# Altium PCB PCB_Base.PcbDoc
Units mil, origin at the board's own origin, x right, y up, seen from the top; angles counter-clockwise.
Board outline 2331.25 x 1793.75 mil, 2 copper layers (Top Layer, Bottom Layer), stack 61.756 mil thick; 101 components, 82 nets, 310 pads, 335 vias.
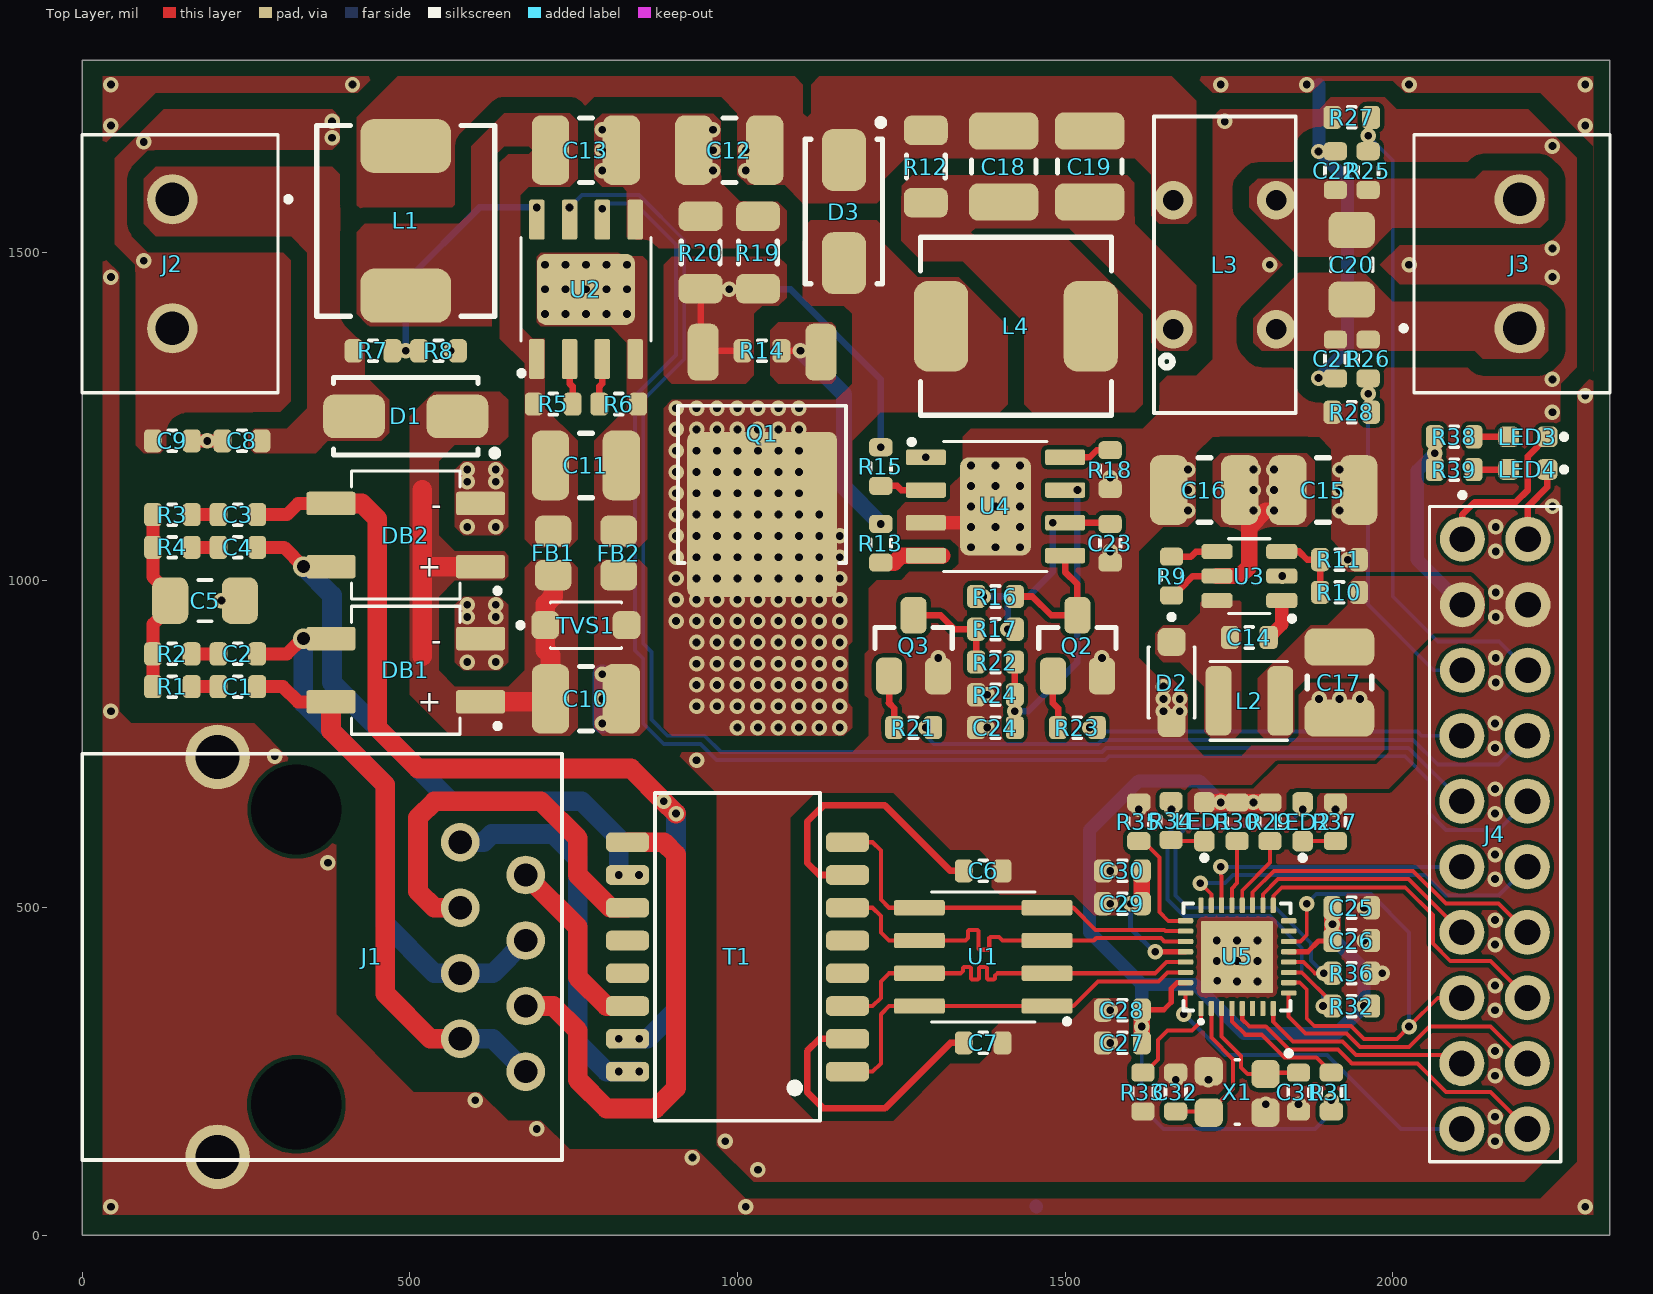
[diagram p0: Top Layer view]
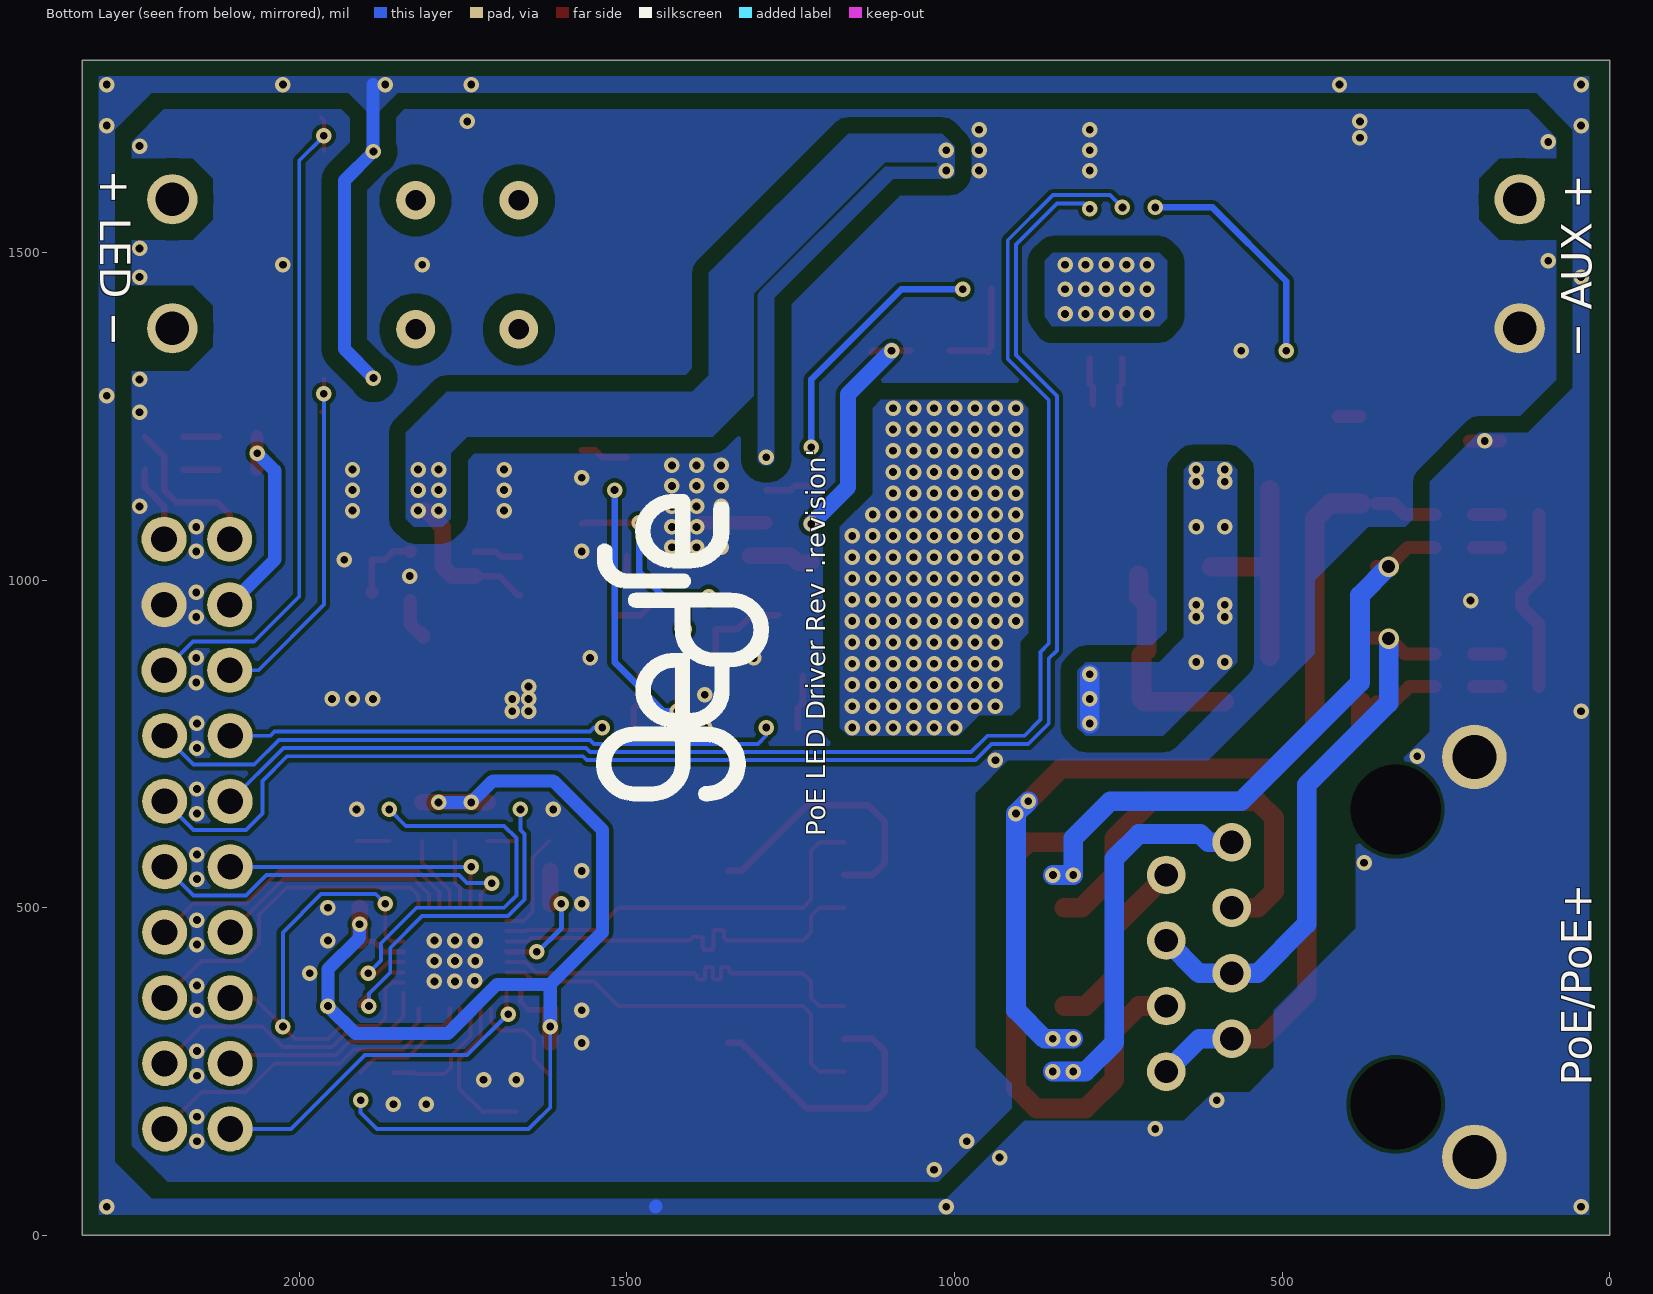
[diagram p1: Bottom Layer view, seen from below]

## Layer stack, top to bottom
Top Solder: solder mask 1, SM-001, Dk 4
Top Layer: signal copper 1.378
Dielectric 1: core 59, Core-043, Dk 4.3
Bottom Layer: signal copper 1.378
Bottom Solder: solder mask 1, SM-001, Dk 4

## Board outline
0,0 2331.25,0 2331.25,1793.75 0,1793.75

## Design rules (kind name [scope] priority, off if disabled: settings)
Clearance Clearance_1 [InNet('VBUS') vs InNet('NetC9_1')] p1: gap=6.25 ignorepadtopadclearanceinfootprint=FALSE
Clearance Clearance_3 [InNet('APD-') vs InNet('NetC10_2')] p2: gap=25 ignorepadtopadclearanceinfootprint=FALSE
Clearance Clearance_9 [InNet('APD-') vs InNet('NetC11_2')] p3: gap=25 ignorepadtopadclearanceinfootprint=FALSE
Clearance Clearance_10 [InNet('APD-') vs InNet('NetD3_A')] p4: gap=25 ignorepadtopadclearanceinfootprint=FALSE
Clearance Clearance_8 [InNet('APD-') vs InNet('NetC18_2')] p5: gap=25 ignorepadtopadclearanceinfootprint=FALSE
Clearance Clearance_7 [InNet('APD-') vs InNet('RETURN')] p6: gap=25 ignorepadtopadclearanceinfootprint=FALSE
Clearance Clearance_6 [InNet('APD-') vs InNet('VLEDN')] p7: gap=25 ignorepadtopadclearanceinfootprint=FALSE
Clearance Clearance_5 [InNet('APD-') vs InNet('VLEDP')] p8: gap=25 ignorepadtopadclearanceinfootprint=FALSE
Clearance Clearance_4 [InNet('VBUS')] p9: gap=25 ignorepadtopadclearanceinfootprint=FALSE
Clearance Clearance_2 [InNet('APD+')] p10: gap=25 ignorepadtopadclearanceinfootprint=FALSE
Clearance [All] p11: gap=6 ignorepadtopadclearanceinfootprint=FALSE
DiffPairsRouting [All] p1: maxlimit=12.5 minlimit=6.25 mostfreqgap=12.5 toplayer_minwidth=6.25 toplayer_maxwidth=10 toplayer_prefwidth=10 bottomlayer_minwidth=6.25 bottomlayer_maxwidth=10 bottomlayer_prefwidth=10 maxuncoupledlength=500
PolygonConnect [All] p1: connectstyle=Direct reliefconductorwidth=10 reliefentries=4 polygonreliefangle="90 Angle" airgapwidth=10
RoutingVias [All] p1: holewidth=11.81 width=23.62 viastyle="Through Hole" minholewidth=11.81 minwidth=23.62 maxholewidth=39.37 maxwidth=78.74
SolderMaskExpansion [All] p1: expansion=0 istentingtop=FALSE
SupplyNets "Schematic Supply Nets" [InNet('3V3')] p1: voltage=0.000
SupplyNets "Schematic Supply Nets_3" [InNet('APD-')] p2: voltage=0.000
SupplyNets "Schematic Supply Nets_2" [InNet('RETURN')] p3: voltage=0.000
SupplyNets "Schematic Supply Nets_1" [InNet('VBUS')] p4: voltage=0.000
Width [All] p1: maxlimit=100 minlimit=6 preferedwidth=30
29 further rules are at their usual default settings.

## Classes and differential pairs
component class Sheet4: J4 LED3 LED4 R38 R39
component class Sheet3: C25 C26 C27 C28 C29 C30 C31 C32 LED1 LED2 R29 R30 R31 R32 R33 R34 R35 R36 R37 U5 X1
component class Sheet1: C10 C11 C12 C13 C14 C15 C16 C17 D1 D2 DB1 DB2 FB1 FB2 L1 L2 R5 R6 R7 R8 R9 R10 R11 TVS1 U2 U3
component class Sheet0: C1 C2 C3 C4 C5 C6 C7 C8 C9 J1 J2 R1 R2 R3 R4 T1 U1
component class Sheet2: C18 C19 C20 C21 C22 C23 C24 D3 J3 L3 L4 Q1 Q2 Q3 R12 R13 R14 R15 R16 R17 R18 R19 R20 R21 R22 R23 R24 R25 R26 R27 R28 U4
differential pair TD: +TD_P -TD_N
differential pair RD: +RD_P -RD_N

## Components (designator, comment, footprint, x,y, rotation, side; value= is the part's Value field where it differs from the comment)
C1 "10n 100V" CAP_SMD_0603 237.5,837.5 r180 top
C2 "10n 100V" CAP_SMD_0603 237.5,887.5 r180 top
C3 "10n 100V" CAP_SMD_0603 237.5,1100 r180 top
C4 "10n 100V" CAP_SMD_0603 237.5,1050 r180 top
C5 "1n 2kV" CAP_SMD_1206 187.5,968.75 r0 top
C6 "100n 16V" CAP_SMD_0603 1375,556.25 r0 top
C7 "100n 16V" CAP_SMD_0603 1375,293.75 r0 top
C8 "10n 100V" CAP_SMD_0603 243.75,1212.5 r180 top
C9 "10n 100V" CAP_SMD_0603 137.5,1212.5 r0 top
C10 "10u 100V" CAP_SMD_1210 768.75,818.75 r0 top
C11 "10u 100V" CAP_SMD_1210 768.75,1175 r0 top
C12 "10u 100V" CAP_SMD_1210 987.5,1656.25 r180 top
C13 "10u 100V" CAP_SMD_1210 768.75,1656.25 r0 top
C14 "100n 16V" CAP_SMD_0603 1781.25,912.5 r180 top
C15 "10u 100V" CAP_SMD_1210 1893.75,1137.5 r0 top
C16 "10u 100V" CAP_SMD_1210 1712.5,1137.5 r180 top
C17 "10u 16V" CAP_SMD_1210 1918.75,843.75 r270 top
C18 "10u 100V" CAP_SMD_1210 1406.25,1631.25 r270 top
C19 "10u 100V" CAP_SMD_1210 1537.5,1631.25 r270 top
C20 "100n 100V" CAP_SMD_1206 1937.5,1481.25 r270 top
C21 "10n 100V" CAP_SMD_0603 1912.5,1337.5 r270 top
C22 "10n 100V" CAP_SMD_0603 1912.5,1625 r90 top
C23 "1u 16V" CAP_SMD_0603 1568.75,1056.25 r270 top
C24 "1u 16V" CAP_SMD_0603 1393.75,775 r180 top
C25 "10u 16V" CAP_SMD_0603 1937.5,500 r0 top
C26 "100n 16V" CAP_SMD_0603 1937.5,450 r0 top
C27 "10u 16V" CAP_SMD_0603 1587.5,293.75 r180 top
C28 "100n 16V" CAP_SMD_0603 1587.5,343.75 r180 top
C29 "10u 16V" CAP_SMD_0603 1587.5,506.25 r180 top
C30 "100n 16V" CAP_SMD_0603 1587.5,556.25 r180 top
C31 "20p 16V" CAP_SMD_0603 1856.25,218.75 r270 top
C32 "20p 16V" CAP_SMD_0603 1668.75,218.75 r90 top
D1 "ES2B" D_SMA 493.75,1250 r180 top
D2 "DSK110" D_SMD_SOD123W 1662.5,843.75 r270 top
D3 "ES2B" D_SMA 1162.5,1562.5 r270 top
DB1 "MB210S" IC_MBS 493.75,862.5 r180 top
DB2 "MB210S" IC_MBS 493.75,1068.75 r180 top
FB1 "30" FB_SMD_0805 718.75,1041.34 r90 top
FB2 "30" FB_SMD_0805 818.75,1041.34 r90 top
J1 "RC00994" CON_PTH_RJ45_RC00994 0,425 r90 top
J2 "5mm pitch" CON_SCREW_5MM 137.5,1482.82 r270 top
J3 "5mm pitch" CON_SCREW_5MM 2193.75,1482.82 r90 top
J4 "Header 20P 10x2" CON_PTH_20P_HEADER_10x2_2.54mm_FEMALE 2155.46,612.5 r270 top
L1 "100u 2A" IND_SMD7.1X6.6X5 493.75,1548.33 r90 top
L2 "22u 1A" IND_SMD3X3X1.2MM 1781.25,815.75 r0 top
L3 "1m 2A" IND_CM_PTH_10X6X5 1743.75,1481.25 r90 top
L4 "100u 2A" IND_SMD7.1X6.6X5 1425,1387.5 r0 top
LED1 "YELLOW" LED_SMD_0603 1712.5,631.25 r90 top
LED2 "GREEN" LED_SMD_0603 1862.5,631.25 r90 top
LED3 "RED" LED_SMD_0603 2206.25,1218.75 r180 top
LED4 "BLUE" LED_SMD_0603 2206.25,1168.75 r180 top
Q1 "SE10015" IC_TO252 1037.5,1181.5 r180 top
Q2 "BC846" IC_SOT23 1518.75,900 r270 top
Q3 "BC846" IC_SOT23 1268.75,900 r270 top
R1 "75" RES_SMD_0603 137.5,837.5 r180 top
R2 "75" RES_SMD_0603 137.5,887.5 r180 top
R3 "75" RES_SMD_0603 137.5,1100 r180 top
R4 "75" RES_SMD_0603 137.5,1050 r180 top
R5 "24.9k" RES_SMD_0603 718.75,1268.75 r0 top
R6 "90.9" RES_SMD_0603 818.75,1268.75 r0 top
R7 "120k" RES_SMD_0603 443.75,1350 r0 top
R8 "4k7" RES_SMD_0603 543.75,1350 r0 top
R9 "100k" RES_SMD_0603 1662.5,1006.25 r90 top
R10 "33k" RES_SMD_0603 1918.75,981.25 r180 top
R11 "10k" RES_SMD_0603 1918.75,1031.25 r0 top
R12 "47k" RES_SMD_1206 1287.5,1631.25 r270 top
R13 "10" RES_SMD_0603 1218.75,1056.25 r90 top
R14 "47k" RES_SMD_0603 1037.5,1350 r0 top
R15 "100" RES_SMD_0603 1218.75,1173.28 r90 top
R16 "10k" RES_SMD_0603 1393.75,975 r0 top
R17 "10k" RES_SMD_0603 1393.75,925 r180 top
R18 "100k" RES_SMD_0603 1568.75,1168.75 r90 top
R19 "TBD" RES_SMD_1206 1031.25,1500 r90 top
R20 "TBD" RES_SMD_1206 943.75,1500 r90 top
R21 "1k" RES_SMD_0603 1268.75,775 r0 top
R22 "10k" RES_SMD_0603 1393.75,875 r0 top
R23 "1k" RES_SMD_0603 1518.75,775 r0 top
R24 "10k" RES_SMD_0603 1393.75,825 r180 top
R25 "560k" RES_SMD_0603 1962.5,1625 r90 top
R26 "560k" RES_SMD_0603 1962.5,1337.5 r270 top
R27 "22k" RES_SMD_0603 1937.5,1706.25 r180 top
R28 "22k" RES_SMD_0603 1937.5,1256.25 r180 top
R29 "5k1" RES_SMD_0603 1812.5,631.25 r90 top
R30 "5k1" RES_SMD_0603 1762.5,631.25 r90 top
R31 "5k1" RES_SMD_0603 1906.25,218.75 r270 top
R32 "5k1" RES_SMD_0603 1937.5,350 r0 top
R33 "5k1" RES_SMD_0603 1618.75,218.75 r270 top
R34 "1k" RES_SMD_0603 1661.66,633.13 r90 top
R35 "6k19" RES_SMD_0603 1612.5,631.25 r90 top
R36 "5k1" RES_SMD_0603 1937.5,400 r0 top
R37 "1k" RES_SMD_0603 1912.5,631.25 r90 top
R38 "1k" RES_SMD_0603 2093.75,1218.75 r0 top
R39 "1k" RES_SMD_0603 2093.75,1168.75 r0 top
T1 "H1102NL" T_SMD_H1102NL 1000,425 r90 top
TVS1 "PTVS58VS1UR,115" D_SOD123W 768.75,931.25 r0 top
U1 "SLVU2.8-4.TBT" IC_SOIC8 1375,425 r180 top
U2 "TPS2378" IC_SOIC8_TP 768.75,1443.75 r90 top
U3 "LV2862" IC_SOT23_6 1781.25,1006.25 r180 top
U4 "MXHV9910BE" IC_SOIC8_TP 1393.75,1112.5 r0 top
U5 "IP101G" IC_QFN32_4X4 1762.5,425 r0 top
X1 "25MHz" XTAL_SMD_3525 1762.5,218.75 r270 top

## Footprints (in the part's own frame and the unit in brackets; to place one, negate y for a bottom-side part, rotate by r counter-clockwise, add the part's x,y. Pads: shape width x height; smd on the part's side, far side on the other; paste and mask are expansions set on the pad)
CAP_SMD_0603 [mm] "0603 Chip Capacitor, 2-Leads, Body 1,60x0,80mm, IPC Medium Density"
  rrect50% 0.7x0.9 smd paste-2539.97: 1(-0.75,0) 2(0.75,0)
  silkscreen extent -0.15,-0.4 0.15,0.4, body extent -0.85,-0.45 0.85,0.45, height 0.9
CAP_SMD_1206 [mm] "1206 Chip Capacitor, 2-Leads, Body 3,20x1,60mm, IPC Medium Density"
  rrect50% 1.4x1.8 smd: 1(-1.35,0) 2(1.35,0)
  silkscreen extent -0.25,-0.8 0.25,0.8, body extent -1.7,-0.9 1.7,0.9, height 1.8
CAP_SMD_1210 [mm] "1210 Chip Capacitor, 2-Leads, Body 3,20x2,50mm, IPC Medium Density"
  rrect50% 1.45x2.7 smd: 1(-1.375,0) 2(1.375,0)
  silkscreen extent -0.25,-1.25 0.25,1.25, body extent -1.75,-1.35 1.75,1.35, height 2.5
CON_PTH_20P_HEADER_10x2_2.54mm_FEMALE [mm] "10x2 20P PTH female pin header. 2.54mm pitch"
  round 1.75 hole 1: 1(-11.43,-1.25) 2(-11.43,1.29) 3(-8.89,-1.25) 4(-8.89,1.29) 5(-6.35,-1.25) 6(-6.35,1.29) 7(-3.81,-1.27) 8(-3.81,1.27) 9(-1.27,-1.27) 10(-1.27,1.27) 11(1.27,-1.27) 12(1.27,1.27) 13(3.81,-1.27) 14(3.81,1.27) 15(6.35,-1.27) 16(6.35,1.27) 17(8.89,-1.27) 18(8.89,1.27) 19(11.43,-1.27) 20(11.43,1.27)
  silkscreen extent -13.24,-2.52 12.7,2.56, body extent -12.7,-2.54 12.7,2.54, height 8.52
CON_PTH_RJ45_RC00994 [mm] "RC00994 RJ45 Connector"
  round 1.5 hole 0.9: 1(4.445,-14.65) 2(3.175,-17.19) 3(1.905,-14.65) 4(0.635,-17.19) 5(-0.635,-14.65) 6(-1.905,-17.19) 7(-3.175,-14.65) 8(-4.445,-17.19)
  rrect50% 0x0 hole 3.5 unplated paste-2539.97 mask+0.102: NC5(-5.715,-8.3) NC5(5.715,-8.3)
  round 2.5 hole 1.7: S1(7.75,-5.25) S2(-7.75,-5.25)
  silkscreen extent -7.88,-18.6 7.88,0, body extent -7.9,-18.6 7.9,0, height 13.21
CON_SCREW_5MM [mm]
  round 1.95 hole 1.3: 1(-2.5,0) 2(2.5,0)
  silkscreen extent -5,-3.5 5,4.6, body extent -5.5,-3.5 5,4.1, height 10.01
D_SMA [mm] "Molded Diode, 2-Leads, Body 5,20x2,73mm, IPC Medium Density"
  rrect50% 2.4x1.7 smd: A(2,0) K(-2,0)
  silkscreen extent -3.58,-1.5 2.8,1.55, body extent -2.57,-1.28 2.57,1.28, height 2.51
D_SMD_SOD123W [mm]
  rrect50% 1.08x1.09 smd: A(1.575,0) K(-1.575,0)
  silkscreen extent -2.64,-0.9 1.38,0.9, body extent -1.85,-0.9 1.85,0.9, height 1.02
D_SOD123W [mm]
  rrect50% 1.08x1.09 smd: A(1.575,0) K(-1.575,0)
  silkscreen extent -2.64,-0.9 1.38,0.9, body extent -1.85,-0.9 1.85,0.9, height 1.02
FB_SMD_0805 [mm] "0805 Ferrite Bead, 2-Leads, Body 2,00x1,20mm, IPC Medium Density"
  rrect50% 1.19x1.42 smd: 1(-0.855,0) 2(0.855,0)
  body extent -1.1,-0.7 1.1,0.7, height 1.1
IC_MBS [mm]
  rrect23% 1.91x0.91 smd paste+0 mask+0.102: 1(-2.9,1.225) 2(-2.9,-1.225) 3(2.9,-1.225) 4(2.9,1.225)
  silkscreen extent -3.66,-2.48 2.1,2.48, body extent -3.25,-2.35 3.25,2.35, height 1.66
IC_QFN32_4X4 [mm]
  rrect50% 0.2x0.6 smd paste-100 mask+0.051: 1(-1.4,-2) 2(-1,-2) 3(-0.6,-2) 4(-0.2,-2) 5(0.2,-2) 6(0.6,-2) 7(1,-2) 8(1.4,-2) 17(1.4,2) 18(1,2) 19(0.6,2) 20(0.2,2) 21(-0.2,2) 22(-0.6,2) 23(-1,2) 24(-1.4,2)
  rrect50% 0.6x0.2 smd paste-100 mask+0.051: 9(2,-1.4) 10(2,-1) 11(2,-0.6) 12(2,-0.2) 13(2,0.2) 14(2,0.6) 15(2,1) 16(2,1.4) 25(-2,1.4) 26(-2,1) 27(-2,0.6) 28(-2,0.2) 29(-2,-0.2) 30(-2,-0.6) 31(-2,-1) 32(-2,-1.4)
  rrect5% 2.8x2.8 smd paste-100 mask+0.051: TP(0,0)
  silkscreen extent -2.08,-2.58 2.08,2.08, body extent -2.02,-2.01 2,2.01, height 0.92
IC_SOIC8 [mm] "Generic SOIC8 package"
  rrect25% 1.97x0.59 smd: 1(-2.475,1.905) 2(-2.475,0.635) 3(-2.475,-0.635) 4(-2.475,-1.905) 5(2.475,-1.905) 6(2.475,-0.635) 7(2.475,0.635) 8(2.475,1.905)
  silkscreen extent -3.35,-2.52 2,2.6, body extent -3,-2.45 3,2.45, height 1.75
IC_SOIC8_TP [mm] "Generic SOIC8 package with thermal pad"
  rrect25% 1.55x0.6 smd: 1(-2.7,1.905) 2(-2.7,0.635) 3(-2.7,-0.635) 4(-2.7,-1.905) 5(2.7,-1.905) 6(2.7,-0.635) 7(2.7,0.635) 8(2.7,1.905)
  rrect25% 2.75x3.8 smd: TP(0,0)
  silkscreen extent -3.35,-2.52 2,2.6, body extent -3,-2.45 3,2.45, height 1.75
IC_SOT23 [mil] "Generic SOT23 package"
  rrect50% 56x40 smd: 1(46.26,-37.4) 2(46.26,37.4) 3(-46.26,0)
  silkscreen extent -28,-59 4,59, body extent -49,-59 49,59, height 44
IC_SOT23_6 [mm]
  rrect50% 1.21x0.59 smd: 1(-1.255,0.95) 2(-1.255,0) 3(-1.255,-0.95) 4(1.255,-0.95) 5(1.255,0) 6(1.255,0.95)
  silkscreen extent -1.75,-1.45 0.8,1.75, body extent -1.4,-1.45 1.4,1.45, height 1.45
IC_TO252 [mm] "Generic TO252 package 6.35x9.4mm"
  rrect50% 1.2x2.2 smd: 1(-2.28,-4.23) 3(2.28,-4.23)
  rrect10% 5.8x6.4 smd paste-10: 2(0,2.07)
  silkscreen extent -3.25,-2.15 3.25,3.95, body extent -3.28,-4.95 3.28,4.95, height 2.39
IND_CM_PTH_10X6X5 [mm] "Toroidal common mode choke - 10x6x5 core"
  round 1.5 hole 0.8: 1(-2.5,2) 2(-2.5,-2) 3(2.5,2) 4(2.5,-2)
  silkscreen extent -5.75,-2.75 5.75,2.75, body extent -5.55,-2.55 5.55,2.55, height 11.03
IND_SMD3X3X1.2MM [mm]
  rrect50% 1x2.7 smd: 1(-1.2,0) 2(1.2,0)
  silkscreen extent -1.52,-1.52 1.48,1.52, body extent -1.5,-1.5 1.5,1.5, height 1.21
IND_SMD7.1X6.6X5 [mm] "Precision Wire Wound Inductor, 2-Leads, Body 7,10x6,60mm, IPC Medium Density"
  rrect50% 2.1x3.5 smd: 1(-2.9,0) 2(2.9,0)
  silkscreen extent -3.7,-3.45 3.7,3.45, body extent -3.65,-3.3 3.65,3.3, height 2.81
LED_SMD_0603 [mm]
  rrect50% 0.8x0.8 smd: A(0.75,0) K(-0.75,0)
  silkscreen extent -1.5,-0.1 -1.3,0.1, body extent -0.8,-0.4 0.8,0.4, height 0.65
RES_SMD_0603 [mm] "0603 Chip Resistor, 2-Leads, Body 1,60x0,80mm, IPC Medium Density"
  rrect50% 0.7x0.9 smd: 1(-0.75,0) 2(0.75,0)
  silkscreen extent -0.15,-0.4 0.15,0.4, body extent -0.85,-0.45 0.85,0.45, height 0.45
RES_SMD_1206 [mm] "1206 Chip Resistor, 2-Leads, Body 3.1x1.55mm, IPC Medium Density"
  rrect50% 1.15x1.7 smd: 1(-1.4,0) 2(1.4,0)
  silkscreen extent -0.45,-0.75 0.45,0.75, body extent -1.63,-0.85 1.63,0.85, height 0.45
T_SMD_H1102NL [mm] "350uH 100M LAN Transformer 1:1 Surface Mount-16P,12.7x7mm"
  rrect50% 0.76x1.67 smd paste+0 mask+0.102: 1(-4.445,-4.265) 2(-3.175,-4.265) 3(-1.905,-4.265) 4(-0.635,-4.265) 5(0.635,-4.265) 6(1.905,-4.265) 7(3.175,-4.265) 8(4.445,-4.265) 9(4.445,4.265) 10(3.175,4.265) 11(1.905,4.265) 12(0.635,4.265) 13(-0.635,4.265) 14(-1.905,4.265) 15(-3.175,4.265) 16(-4.445,4.265)
  silkscreen extent -6.35,-3.2 6.35,3.2, body extent -6.35,-4.7 6.35,4.7, height 5.97
XTAL_SMD_3525 [mm] "SMD Crystal 3.5x2.5x0.7mm"
  rrect50% 1.1x1.1 smd: 1(-0.7,1.1) 2(-0.8,-1.1) 3(0.8,-1.1) 4(0.8,1.1)
  silkscreen extent -1.6,-0.08 1.25,2.1, body extent -1.25,-1.6 1.25,1.6, height 0.7

## Part data
C1 C2 C3 C4 C5 C6 C7 C8 C9 C10 C11 C12 C13 C14 C15 C16 C17 C18 C19 C20 C21 C22 C23 C24 C25 C26 C27 C28 C29 C30 C31 C32: library part CAP_SMD, "Capacitor SMD - Generic"
D1 D3: library part ES1J, "100V 2A Super Fast Recovery Rectifier", Datasheet=https://www.onsemi.com/download/data-sheet/pdf/es1j-d.pdf
D2: library part DIODE_SMD, "100V 1A Schottky Barrier Diode"
DB1 DB2: library part MB2S, "100 2A diode bridge", Package="SOT-23-6 Fortune Semiconductor", Check_prices=https://www.snapeda.com/parts/DW01A/Fortune+Semiconductor/view-part/?ref=eda, MF="Fortune Semiconductor", MP=DW01A, SnapEDA_Link=https://www.snapeda.com/parts/DW01A/Fortune+Semiconductor/view-part/?ref=snap
FB1 FB2: library part FB_SMD, "Ferrite bead SMD - Generic"
J1: library part CON_PTH_RJ45_RC00994, "RC00994 RJ45 connector - No LEDs"
J2 J3: library part CON_SCREW-2P-5mm, "5mm pitch 2P screw terminal block"
J4: library part CON_PTH_HEADER_20P_10x2, "10x2 20P PTH pin header - Generic"
L1 L2 L4: library part IND_SMD, "Inductor SMD - Generic"
L3: library part IND_CM_PTH, "Common mode inductor PTH- Generic"
LED1 LED2 LED3 LED4: library part LED_SMD, "LED SMD - Generic"
Q1: library part MOSFET_SMD, "100V 15A 80mOhm N MOSFET"
Q2 Q3: library part TRAN_SMD_NPN, "SMD transistor NPN - Generic"
R1 R2 R3 R4 R5 R6 R7 R8 R9 R10 R11 R12 R13 R14 R15 R16 R17 R18 R19 R20 R21 R22 R23 R24 R25 R26 R27 R28 R29 R30 R31 R32 R33 R34 R35 R36 R37 R38 R39: library part RES_SMD, "Resistor SMD - Generic"
T1: "Isolation and Data Interface (Encapsulated) Pulse Transformer 1:1 Transmitter, 1:1 Receiver Surface Mount", Package="Non Standard Pulse", Check_prices=https://www.snapeda.com/parts/H1102NL/Pulse/view-part/?ref=eda, MF=Pulse, MP=H1102NL, SnapEDA_Link=https://www.snapeda.com/parts/H1102NL/Pulse/view-part/?ref=snap
TVS1: library part ZENER_SMD, "SMD zener diode - Generic"
U1: library part IC_SLVU2.8-4.TBT, "15V Clamp 24A (8/20µs) Ipp Tvs Diode Surface Mount 8-SO", Package="SOIC-8 Semtech", Check_prices=https://www.snapeda.com/parts/SLVU2.8-4.TBT/Semtech/view-part/?ref=eda, MF="Semtech Corporation", MP=SLVU2.8-4.TBT, SnapEDA_Link=https://www.snapeda.com/parts/SLVU2.8-4.TBT/Semtech/view-part/?ref=snap
U2: "IEEE 802.3at PoE High-Power PD Interface", Package="SOT-23-6 Fortune Semiconductor", Check_prices=https://www.snapeda.com/parts/DW01A/Fortune+Semiconductor/view-part/?ref=eda, MF="Fortune Semiconductor", MP=DW01A, SnapEDA_Link=https://www.snapeda.com/parts/DW01A/Fortune+Semiconductor/view-part/?ref=snap
U3: "Buck converter controller", Datasheet=https://www.littelfuse.com/assetdocs/littelfuse-integrated-circuits-mxhv9910-datasheet?assetguid=0135616d-093f-45d8-8766-b0e533f2ef99
U4: "Off-Line, High Brightness LED Driver", Datasheet=https://www.littelfuse.com/assetdocs/littelfuse-integrated-circuits-mxhv9910-datasheet?assetguid=0135616d-093f-45d8-8766-b0e533f2ef99
U5: library part IC_IP101G, "Single Port 10/100 MII/RMII/TP/Fiber Fast Ethernet Transceiver"
X1: library part XTAL_SMD_GND, "SMD Crystal with GND - Generic"

## Via types
v1: diameter 23.62, hole 11.81, Top Layer to Bottom Layer, tented both sides, 333 vias
v2: diameter 31.5, hole 19.68, Top Layer to Bottom Layer, tented both sides, 2 vias

## Nets (pads, with @x,y where several pads share a name; then routed paths per layer and width w, separated by ;. In a path a pad name is that pad's centre, name@x,y a point inside that pad or via, vN(x,y) a via of type N, cw(c..) or ccw(c..) an arc to the next point about the centre after c; other vN are vias at no path point)
3V3: C17.1 C25.1 C26.1 C27.1 C28.1 J4.3 L2.2 LED1.A R10.1 R29.2 R30.2 R31.2 R32.2 R38.1 R39.1 U5.13 U5.31 | length 2308.3
  Top Layer w8: C28.1 1617.65,344.37 1650.62,344.37 1661.95,355.7 1661.95,376.81 1670.77,385.63 U5.31 ; U5.13 1870.37,432.87 1886.88,449.38 C26.1@1907.35,449.38
  Top Layer w20: R39.1 v1(2064.22,1193.75) R38.1
  Top Layer w25: C27.1 v1(1617.03,318.75) C28.1 ; LED1.A@1712.5,660.78 1735.78,660.78 1737.5,662.5 1739.22,660.78 R30.2 R29.2 ; C26.1@1907.35,449.38 C26.1 v1(1907.97,475) C25.1
  Bottom Layer w6: v1(1617.03,318.75) 1617.03,195.47 1643.75,168.75 1650,162.5 1881.25,162.5 1906.25,187.5 v1(1906.25,206.25)
  Bottom Layer w20: v1(1617.03,318.75) 1617.03,382.97 ; v1(1787.5,660.78) v1(1737.5,660.78) 1704.53,693.75 1612.5,693.75 1537.5,618.75 1537.5,462.5 1617.03,382.97 ; v1(1907.97,475) 1907.97,454.53 1956.25,406.25 v1(1956.25,350) 1914.06,307.81 1773.44,307.81 1698.28,382.97 1617.03,382.97 ; v1(2064.22,1193.75) 2037.5,1167.03 2037.5,1031.25 J4.3
ADC_VLEDN: J4.5 R26.2 R28.1 | length 560.6
  Top Layer w6: R26.2 v1(1962.5,1284.38) 1962.5,1260.78 R28.1
  Bottom Layer w6: v1(1962.5,1284.38) 1962.5,962.5 2062.5,862.5 J4.5
ADC_VLEDP: J4.6 R25.2 R27.1 | length 1025.1
  Top Layer w6: R25.2 v1(1962.5,1678.12) 1962.5,1701.72 R27.1
  Bottom Layer w6: v1(1962.5,1678.12) 2000,1640.62 2000,975 2068.75,906.25 2162.5,906.25 J4.6
APD+: C8.1 D1.A J2.1 R7.1 | length 33.8
  Top Layer w20: D1.A@381.25,1250 D1.A
APD-: C6.2 C7.2 C9.1 C12.2 C13.2 C15.2 C16.2 C17.2 C23.2 C24.2 C25.2 C26.2 C27.2 C28.2 C29.2 C30.2 C31.2 C32.2 D2.A J2.2 J4.4 Q2.2 Q3.2 R8.2 R11.2 R18.1 R19.2 R20.2 R24.2 R27.2 R28.2 R33.2 R35.2 R36.2 R37.2 U2.5 U3.2 U4.3 U4.TP U5.TP X1.2 X1.4 | length 108.9
  Top Layer w20: U4.3 1387.5,1087.5 v1(1393.75,1081.25)
  other v1: 1031.25,100 981.25,143.75 2156.25,143.75 2156.25,181.25 1806.25,200 1856.25,200 1668.75,237.5 1718.75,237.5 2156.25,243.75 2156.25,281.25 1568.75,293.75 1568.75,343.75 2156.25,343.75 2156.25,381.25 1762.5,387.5 1793.75,387.5 1732.17,388.42 1984.06,400 1731.25,418.75 1762.5,418.75 1793.75,418.75 2156.25,443.75 1731.25,450 1762.5,450 1793.75,450 1956.25,450 2156.25,481.25 1956.25,500 1568.75,506.25 2156.25,543.75 1568.75,556.25 2156.25,581.25 2156.25,643.75 1612.5,650 1912.5,650 2156.25,681.25 937.5,725 2156.25,743.75 1381.25,775 2156.25,781.25 1650,800 1675,800 1650,818.75 1675,818.75 1887.5,818.75 1918.75,818.75 1950,818.75 1381.25,825 1650,837.5 2157.04,843.75 1306.25,881.25 1556.25,881.25 2157.04,881.25 2157.04,943.75 2157.04,981.25 1831.25,1006.25 1931.25,1031.25 1568.75,1043.75 2157.04,1043.75 1356.25,1050 1393.75,1050 1431.25,1050 1356.25,1081.25 1431.25,1081.25 2157.04,1081.25 1687.5,1106.25 1918.75,1106.25 1356.25,1112.5 1393.75,1112.5 1431.25,1112.5 2243.75,1112.5 1687.5,1137.5 1918.75,1137.5 1356.25,1143.75 1393.75,1143.75 1431.25,1143.75 1568.75,1156.25 1687.5,1168.75 1918.75,1168.75 1356.25,1175 1393.75,1175 1431.25,1175 2243.75,1256.25 2243.75,1306.25 562.5,1350 2243.75,1462.5 1812.5,1481.25 2025,1481.25 93.75,1487.5 2243.75,1506.25 793.75,1625 962.5,1625 793.75,1656.25 962.5,1656.25 2243.75,1662.5 93.75,1668.75 381.25,1675 793.75,1687.5 962.5,1687.5 381.25,1700 1743.75,1700
CDB: J4.10 U2.6 | length 2372.8
  Bottom Layer w6: v1(793.75,1566.69) 802.06,1575 843.75,1575 906.25,1512.5 906.25,1343.75 843.75,1281.25 843.75,892.8 856.25,880.3 856.25,781.25 887.5,750 943.75,750 968.25,725.5 1301.28,725.5 1561.22,725.5 1566.97,731.25 2018.75,731.25 2056.25,693.75 2056.25,643.75 2081.25,618.75 2161.71,618.75 J4.10
CLK: J4.15 U5.10 U5.14 | length 760.8
  Top Layer w6: U5.10 1858.12,385.63 1868.75,375 1868.75,331.25 1880.19,319.81 1936.44,319.81 1956.25,300 2006.25,300 v1(2025,318.75) 2068.75,362.5 J4.15 ; U5.14 1858.99,448.62 1868.75,458.38 v1(1868.75,506.25)
  Bottom Layer w6: v1(1868.75,506.25) 1883.31,520.81 1947.63,520.81 1966.69,520.81 2025,462.5 v1(2025,318.75)
COL: R31.1 U5.4 | length 203.7
  Top Layer w6.25: U5.4 1754.63,326.62 1775,306.25 1800,306.25 1835.07,271.18 1883.35,271.18 R31.1
CRS: R29.1 U5.20 | length 115.4
  Top Layer w6: U5.20 1770.37,526.62 1812.5,568.75 R29.1
DIM: J4.8 R21.2 | length 971.9
  Bottom Layer w6: v1(1287.5,775) 1287.5,762.5 1300,750 1550,750 1556.25,756.25 2031.25,756.25 2068.75,718.75 2161.71,718.75 J4.8
ISET: R35.1 U5.25 | length 164
  Top Layer w6: R35.1@1618.75,601.72 1643.75,576.72 1643.75,493.75 1657.38,480.12 U5.25
LD: C24.1 R22.2 R24.1 U4.7 | length 489
  Top Layer w10: C24.1 v1(1423.28,800) R24.1 R22.2
  Bottom Layer w10: v1(1423.28,800) 1443.75,800 1518.75,875 v1(1518.75,1137.5)
LED_1: J4.1 LED3.K | length 246.5
  Top Layer w10: J4.1 2106.25,1100 2125,1118.75 2187.5,1118.75 2206.25,1137.5 2206.25,1189.22 LED3.K
LED_2: J4.2 LED4.K | length 118.5
  Top Layer w10: J4.2 2206.25,1112.5 2235.78,1142.03 LED4.K
MDC: J4.11 U5.22 | length 427.3
  Top Layer w6: v1(1737.5,562.5) 1737.5,550 1738.88,548.62 U5.22
  Bottom Layer w6: v1(1737.5,562.5) J4.11
MDIO: J4.12 U5.23 | length 576.2
  Top Layer w6: v1(1706.25,537.5) 1723.13,520.62 U5.23
  Bottom Layer w6: v1(1706.25,537.5) 1743.75,537.5 1756.25,550 2050,550 2081.25,518.75 2161.71,518.75 J4.12
NetC1_2: C1.2 R1.1 | length 40.9
  Top Layer w20: R1.1 C1.2
NetC2_2: C2.2 R2.1 | length 40.9
  Top Layer w20: R2.1 C2.2
NetC3_2: C3.2 R3.1 | length 40.9
  Top Layer w20: R3.1 C3.2
NetC4_2: C4.2 R4.1 | length 40.9
  Top Layer w20: R4.1 C4.2
NetC5_1: C5.1 R1.2 R2.2 R3.2 R4.2 | length 284.4
  Top Layer w20: R1.2 R2.2 107.97,932.97 134.35,959.35 C5.1 134.35,978.15 107.97,1004.53 R4.2 R3.2
NetC6_1: C6.1 T1.7 | length 422.9
  Top Layer w10: T1.7 1125,550 1106.25,568.75 1106.25,631.25 1131.25,656.25 1225,656.25 1325,556.25 C6.1
NetC7_1: C7.1 T1.2 | length 422.9
  Top Layer w10: T1.2 1125,300 1106.25,281.25 1106.25,218.75 1131.25,193.75 1225,193.75 1325,293.75 C7.1
NetC10_1: C10.1 D1.K DB1.1 DB2.1 FB1.1 TVS1.K | length 669
  Top Layer w30: 518.75,883.76 518.75,1018.75 ; 518.75,1137.5 518.75,1018.75 ; DB1.1@588.24,814.27 710.14,814.27 C10.1 714.62,885.38 706.74,893.26 TVS1.K 706.74,962.99 718.75,975 FB1.1 ; DB2.1 520.52,1020.52 518.75,1018.75
NetC10_2: C10.2 DB1.2 DB2.2 FB2.1 TVS1.A | length 75
  Bottom Layer w30: v1(793.75,781.25) v1(793.75,818.75) v1(793.75,856.25)
  other v1: 587.5,875 631.25,875 587.5,943.75 631.25,943.75 587.5,962.5 631.25,962.5 587.5,1081.25 631.25,1081.25 587.5,1150 631.25,1150 587.5,1168.75 631.25,1168.75
NetC11_1: C11.1 C13.1 FB1.2 L1.1 R5.1 U2.1
NetC11_2: C11.2 FB2.2 R6.2 U2.4 U2.TP
  other v1: 706.25,1406.25 737.5,1406.25 768.75,1406.25 800,1406.25 831.25,1406.25 706.25,1443.75 737.5,1443.75 768.75,1443.75 800,1443.75 831.25,1443.75 706.25,1481.25 737.5,1481.25 768.75,1481.25 800,1481.25 831.25,1481.25
NetC14_1: C14.1 U3.1 | length 66.9
  Top Layer w20: C14.1 1810.78,916.44 1814.56,920.22 1818.49,920.22 1830.66,932.38 U3.1
NetC14_2: C14.2 D2.K L2.1 U3.6
NetC18_2: C18.2 C19.2 L3.1 L4.2 R12.2
NetC29_1: C29.1 C30.1 U5.28 | length 187.5
  Top Layer w8: v1@1637.5,431.25 1639.12,432.87 U5.28
  Top Layer w25: C29.1 C30.1
  Bottom Layer w8: v1(1600,506.25) 1600,468.75 v1@1637.5,431.25
  other v1: 1637.5,432.87
NetD3_A: D3.A L4.1 Q1.2
  other v1: 1000,775 1031.25,775 1062.5,775 1093.75,775 1125,775 1156.25,775 937.5,807.5 968.75,807.5 1000,807.5 1031.25,807.5 1062.5,807.5 1093.75,807.5 1125,807.5 1156.25,807.5 937.5,840 968.75,840 1000,840 1031.25,840 1062.5,840 1093.75,840 1125,840 1156.25,840 937.5,872.5 968.75,872.5 1000,872.5 1031.25,872.5 1062.5,872.5 1093.75,872.5 1125,872.5 1156.25,872.5 937.5,905 968.75,905 1000,905 1031.25,905 1062.5,905 1093.75,905 1125,905 1156.25,905 906.25,937.5 937.5,937.5 968.75,937.5 1000,937.5 1031.25,937.5 1062.5,937.5 1093.75,937.5 1125,937.5 1156.25,937.5 906.25,970 937.5,970 968.75,970 1000,970 1031.25,970 1062.5,970 1093.75,970 1125,970 1156.25,970 906.25,1002.5 937.5,1002.5 968.75,1002.5 1000,1002.5 1031.25,1002.5 1062.5,1002.5 1093.75,1002.5 1125,1002.5 1156.25,1002.5 906.25,1035 937.5,1035 968.75,1035 1000,1035 1031.25,1035 1062.5,1035 1093.75,1035 1125,1035 1156.25,1035 906.25,1067.5 937.5,1067.5 968.75,1067.5 1000,1067.5 1031.25,1067.5 1062.5,1067.5 1093.75,1067.5 1125,1067.5 1156.25,1067.5 906.25,1100 937.5,1100 968.75,1100 1000,1100 1031.25,1100 1062.5,1100 1093.75,1100 1125,1100 906.25,1132.5 937.5,1132.5 968.75,1132.5 1000,1132.5 1031.25,1132.5 1062.5,1132.5 1093.75,1132.5 906.25,1165 937.5,1165 968.75,1165 1000,1165 1031.25,1165 1062.5,1165 1093.75,1165 906.25,1197.5 937.5,1197.5 968.75,1197.5 1000,1197.5 1031.25,1197.5 1062.5,1197.5 1093.75,1197.5 906.25,1230 937.5,1230 968.75,1230 1000,1230 1031.25,1230 1062.5,1230 1093.75,1230 906.25,1262.5 937.5,1262.5 968.75,1262.5 1000,1262.5 1031.25,1262.5 1062.5,1262.5 1093.75,1262.5
NetJ1_1: J1.1 T1.16 | length 568.3
  Bottom Layer w30: J1.1@601.77,600 612.5,600 625,612.5 718.75,612.5 756.25,575 756.25,293.75 800,250 v1(818.75,250) v1(850,250)
NetJ1_2: J1.2 T1.14 | length 283.1
  Top Layer w30: J1.2 756.25,470.52 756.25,393.75 800,350 T1.14
NetJ1_3: J1.3 T1.11 | length 617.3
  Top Layer w30: J1.3 537.5,500 512.5,525 512.5,637.5 537.5,662.5 700,662.5 756.25,606.25 756.25,550 806.25,500 T1.11
NetJ1_6: J1.6 T1.9 | length 789.3
  Top Layer w30: J1.6 718.75,350 756.25,312.5 756.25,237.5 800,193.75 875,193.75 906.25,225 906.25,581.25 887.5,600 T1.9
NetLED1_K: LED1.K R34.1 | length 43.8
  Top Layer w6: R34.1@1668.75,601.72 LED1.K
NetLED2_K: LED2.K R37.1 | length 50
  Top Layer w6: LED2.K R37.1
NetLED3_A: LED3.A R38.2 | length 53.4
  Top Layer w10: R38.2 LED3.A
NetLED4_A: LED4.A R39.2 | length 53.4
  Top Layer w10: R39.2 LED4.A
NetQ1_1: Q1.1 R13.2 R14.2 | length 376.1
  Top Layer w10: R14.2 v1(1096.16,1350) 1125.3,1350 Q1.1
  Bottom Layer w25: v1(1096.16,1350) 1162.5,1283.66 1162.5,1142.03 v1(1218.75,1085.78)
NetQ1_3: Q1.3 R14.1 R15.2 R19.1 R20.1 | length 541.3
  Top Layer w10: Q1.3@943.75,1356.25 R20.1 ; Q1.3 949.7,1350 R14.1
  Bottom Layer w10: v1(987.5,1443.75) 1081.25,1443.75 1218.75,1306.25 v1(1218.75,1202.81)
NetQ2_1: Q2.1 R23.1 | length 82.1
  Top Layer w10: Q2.1 1481.25,853.64 1481.25,812.5 1489.22,804.53 R23.1
NetQ3_1: Q3.1 R21.1 | length 82.1
  Top Layer w10: Q3.1 1231.35,812.6 1231.25,812.5 1239.22,804.53 R21.1
NetQ3_3: Q3.3 R17.2 R22.1 | length 154.3
  Top Layer w10: Q3.3 1309.99,946.26 1331.25,925 R17.2 R22.1
NetR5_2: R5.2 U2.2 | length 70.6
  Top Layer w10: U2.2 743.75,1300 748.28,1295.47 R5.2
NetR6_1: R6.1 U2.3 | length 70.6
  Top Layer w10: R6.1 789.22,1295.47 793.75,1300 U2.3
NetR7_2: R7.2 R8.1 U2.8 | length 352.8
  Bottom Layer w10: v1(493.75,1350) 493.75,1456.25 606.25,1568.75 v1(693.75,1568.75)
NetR9_2: R9.2 U3.4 | length 72.6
  Top Layer w10: R9.2 1692.03,1035.78 1699.25,1043 1731.19,1043 U3.4
NetR10_2: R10.2 R11.1 U3.3 | length 113.8
  Top Layer w10: U3.3@1830.76,1043.75 1857.04,1043.75 1869.54,1031.25 R11.1 R10.2
  Top Layer w20: U3.3 U3.3@1830.76,1043.75
NetR13_1: R13.1 U4.4 | length 98.2
  Top Layer w25: R13.1 1239.22,1026.72 1250,1037.5 U4.4 U4.4@1312.5,1037.5
NetR15_1: R15.1 U4.2 | length 71.3
  Top Layer w10: R15.1 1243.75,1143.75 1250,1137.5 U4.2
NetR18_2: R18.2 U4.8 | length 73.2
  Top Layer w10: U4.8 1537.5,1187.5 1548.28,1198.28 R18.2
PHY_AD0: R32.1 R34.2 U5.11 | length 568.5
  Top Layer w6: U5.11 1861.12,401.38 1907.97,354.53 R32.1
  Bottom Layer w6: v1(1662.5,650) 1662.5,618.75 1656.25,612.5 1656.25,512.5 1681.25,487.5 1812.5,487.5 1861.12,438.88 1861.12,401.38 1893.75,368.75 v1(1893.75,350)
PHY_AD3: LED2.A R36.1 U5.12 | length 663.6
  Top Layer w6: U5.12 1864.12,417.13 1881.25,400 R36.1
  Bottom Layer w6: v1(1862.5,650) 1837.5,625 1687.5,625 1668.75,606.25 1668.75,518.75 1687.5,500 1820.81,500 1875,445.81 1875,419.61 v1(1894.61,400)
PHY_RESET: J4.19 U5.32 | length 530.1
  Top Layer w6.25: v1(1681.25,337.5) 1683.76,340.01 U5.32
  Bottom Layer w6.25: v1(1681.25,337.5) 1743.75,275 1900,275 2012.5,162.5 J4.19
PoE+: C1.1 DB1.4 J1.7 J1.8 | length 867.2
  Top Layer w20: C1.1 306.25,837.5 329.48,814.27 DB1.4@356.25,814.27
  Top Layer w30: DB1.4 379.58,770.42 462.5,687.5 462.5,368.75 531.25,300 J1.7
  Bottom Layer w30: J1.7@601.77,300 J1.7 626.77,300 J1.8
PoE-: C2.1 DB1.3 J1.4 J1.5 | length 875.7
  Top Layer w20: C2.1 312.5,887.5 335.03,910.03 335.83,910.03 336.81,911.02 v2@336.81,911.81 ; v2@338.19,911.81 378.5,911.81 DB1.3
  Bottom Layer w30: v2(337.5,910.73) 337.5,812.5 462.5,687.5 462.5,475 537.5,400 J1.5 601.77,400 626.77,400 J1.4
PWMD: Q2.3 R16.2 U4.5 | length 206.4
  Top Layer w10: R16.2 1450,975 1478.74,946.26 Q2.3 1518.75,993.65 1500.05,1012.35 U4.5
RD_N: T1.8 U1.4 U1.5 U5.26 | length 616
  Top Layer w6.25: T1.8 1206.25,600 1218.75,587.5 1218.75,512.5 1231.25,500 U1.5 U1.4 1512.5,500 1546.19,466.31 1651.35,466.31 1653.29,464.37 U5.26
RD_P: T1.6 U1.3 U1.6 U5.27 | length 616
  Top Layer w6.25: T1.6 1206.25,500 1218.75,487.5 1218.75,462.5 1231.25,450 U1.6 1312.52,450 1348.14,450 1351.81,453.66 1351.81,464.55 1353.43,466.18 1366.43,466.18 1368.06,464.55 1368.06,437.57 1369.68,435.95 1382.68,435.95 1384.31,437.57 1384.31,453.66 1385.93,455.29 1398.93,455.29 1400.56,453.66 1404.22,450 1437.62,450 U1.3 1543.75,450 1547.56,453.81 1646.17,453.81 1651.36,448.62 U5.27
RETURN: C5.2 C8.2 C9.2 C21.2 C22.2 J1.S1 J1.S2 | length 530.9
  Top Layer w20: C9.2 v1(190.62,1212.5) C8.2
  Bottom Layer w20: 1455.46,44.54 1456.25,43.75 ; v1(1886.77,1308.37) 1931.25,1352.85 1931.25,1609.65 v1(1886.77,1654.13) ; v1@1887.5,1656.25 1887.5,1756.25
  other v1: 43.75,43.75 1012.5,43.75 2293.75,43.75 931.25,118.75 693.75,162.5 600,206.25 375,568.75 293.75,731.25 43.75,800 212.5,968.75 2293.75,1281.25 43.75,1462.5 43.75,1693.75 2293.75,1693.75 43.75,1756.25 412.5,1756.25 1737.5,1756.25 1868.75,1756.25 2025,1756.25 2293.75,1756.25
RXCM: C4.1 DB2.4 T1.10 | length 944.7
  Top Layer w20: C4.1 308.02,1050 v2(337.5,1020.52) DB2.4@356.25,1020.52
  Bottom Layer w30: v2(337.5,1020.52) 381.25,976.77 381.25,843.75 562.5,662.5 762.5,662.5 818.75,606.25 v1(818.75,550) v1@849.68,550 ; v1@824.52,549.84 v1(849.84,549.84)
RXD0: J4.13 U5.18 | length 363.7
  Top Layer w6: U5.18 1801.87,520.62 1825,543.75 2024.21,543.75 J4.13
RXD1: J4.16 U5.17 | length 502.7
  Top Layer w6: U5.17 1818.34,504.46 1818.34,518.34 1831.25,531.25 2018.75,531.25 2061.17,488.83 2061.17,445.35 2087.77,418.75 2149.21,418.75 J4.16
RXDV: J4.14 U5.19 | length 491.6
  Top Layer w6: U5.19 1786.12,523.62 1818.75,556.25 2031.25,556.25 2081.25,506.25 2161.71,506.25 J4.14
RXER: R30.1 U5.21 | length 101.2
  Top Layer w6: U5.21 1754.63,529.63 1762.5,537.5 R30.1
SHDN: J4.7 R23.2 | length 573.1
  Bottom Layer w6: v1(1537.5,775) 1550,775 1556.25,768.75 2037.5,768.75 2043.75,762.5 J4.7
T2P: J4.9 U2.7 | length 2267.4
  Bottom Layer w6: v1(743.75,1568.75) 762.5,1587.5 850,1587.5 918.75,1518.75 918.75,1337.5 856.25,1275 856.25,903.12 868.75,890.62 868.75,787.26 893.51,762.5 950,762.5 975,737.5 1306.25,737.5 1556.25,737.5 1562.5,743.75 2024.21,743.75 J4.9
TD_N: T1.3 U1.2 U1.7 U5.29 | length 622.2
  Top Layer w6.25: T1.3 1206.25,350 1218.75,362.5 1218.75,387.5 1231.25,400 U1.7 1312.6,400 1340.22,400 1343.89,403.66 1343.89,407.83 1345.72,409.67 1354.3,409.67 1356.14,407.83 1356.14,392.31 1357.97,390.47 1366.55,390.47 1368.39,392.31 1368.39,407.83 1370.22,409.67 1378.8,409.67 1380.64,407.83 1380.64,392.31 1382.47,390.47 1391.05,390.47 1392.89,392.31 1392.89,396.34 1396.55,400 1437.36,400 U1.2 1637.5,400 1654.63,417.13 U5.29
TD_P: T1.1 U1.1 U1.8 U5.30 | length 622.5
  Top Layer w6.25: T1.1 1206.25,250 1218.75,262.5 1218.75,337.5 1231.25,350 U1.8 U1.1 1512.5,350 1550,387.5 1642.68,387.5 1656.56,401.38 U5.30
TXCM: C3.1 DB2.3 T1.15 | length 1437.8
  Top Layer w20: C3.1 312.5,1100 329.48,1116.98 DB2.3@356.25,1116.98
  Top Layer w30: DB2.3 426.77,1116.98 450,1093.75 450,775 512.5,712.5 837.5,712.5 v1(887.5,662.5) v1(906.25,643.75)
  Bottom Layer w30: v1(818.75,300) v1(850,300) 862.5,300 906.25,343.75 v1(906.25,643.75) v1(887.5,662.5)
TXD0: J4.18 U5.9 | length 455.7
  Top Layer w6: U5.9 1841.24,333.76 1867.19,307.81 1929.69,307.81 1950,287.5 2025,287.5 2056.25,318.75 2149.21,318.75 J4.18
TXD1: J4.17 U5.8 | length 334.3
  Top Layer w6.25: U5.8 1817.62,326.13 1848.07,295.68 1923.07,295.68 1943.75,275 2092.96,275 J4.17
TXEN: J4.20 U5.5 | length 521
  Top Layer w6.25: U5.5 1770.37,329.63 1781.25,318.75 1806.25,318.75 1841.57,283.43 1878.78,283.43 1916.57,283.43 1937.5,262.5 2037.5,262.5 2081.07,218.93 2149.04,218.93 J4.20
TXER: R33.1 U5.1 | length 161.9
  Top Layer w6.25: R33.1@1617.03,243.75 1641.91,268.63 1641.91,298.16 1656.25,312.5 1693.75,312.5 1707.38,326.13 U5.1
VBUS: C12.1 C15.1 C16.1 C18.1 C19.1 D3.K L1.2 L3.3 R9.1 R12.1 U3.5 U4.1 | length 245.3
  Top Layer w10: R9.1 1665.41,976.72 1675.22,986.52 1694.94,1006.25 U3.5
  Top Layer w25: U3.5 1766.61,1006.25 1781.25,1020.89 1781.25,1081.25 1806.25,1106.25 v1(1818.75,1106.25)
  other v1: 1787.5,1106.25 1787.5,1137.5 1818.75,1137.5 1787.5,1168.75 1818.75,1168.75 1287.5,1187.5 1012.5,1625 1012.5,1656.25
VDD_9910: C23.1 R16.1 R17.1 U4.6 | length 344.1
  Top Layer w10: R16.1 R16.1@1368.75,975 ; R17.1@1418.75,925 R17.1 ; v1(1481.25,1087.5) U4.6 1567.03,1087.5 C23.1
  Bottom Layer w10: v1(1375,975) 1412.5,975 ; v1(1412.5,925) 1412.5,975 ; v1(1481.25,1087.5) 1481.25,1012.5 1443.75,975 1412.5,975
VLEDN: C20.2 C21.1 J3.1 L3.2 R26.1
VLEDP: C20.1 C22.1 J3.2 L3.4 R25.1
XI: C32.1 U5.2 X1.3 | length 239.3
  Top Layer w6.25: C32.1 1717.22,189.22 X1.3 1756.25,224.31 1756.25,268.75 1723.13,301.87 U5.2
XO: C31.1 U5.3 X1.1 | length 196.9
  Top Layer w6.25: U5.3 1738.88,303.44 1768.75,273.57 1768.75,256.25 1778.69,246.31 X1.1 ; X1.1@1803.69,246.31 X1.1 ; C31.1 1825,248.28 1823.03,246.31 X1.1
pads on no net: J1.NC5 T1.4 T1.5 T1.12 T1.13 U5.6 U5.7 U5.15 U5.16 U5.24

## Polygon pours and split planes (outlines as drawn)
VLEDP on Top Layer "m" (solid, remove dead copper, pour order 19): 2225,1625 2137.5,1625 2125,1612.5 1875,1612.5 1793.75,1612.5 1781.25,1600 1781.25,1568.75 1856.25,1493.75 1956.25,1493.75 2000,1537.5 2225,1537.5 2237.5,1550 2237.5,1612.5
VLEDN on Top Layer "m" (solid, remove dead copper, pour order 21): 2225,1337.5 2137.5,1337.5 2125,1350 1875,1350 1856.25,1350 1831.25,1350 1800,1350 1787.5,1362.5 1787.5,1400 1856.25,1468.75 1956.25,1468.75 2000,1425 2225,1425 2237.5,1412.5 2237.5,1350
3V3 on Top Layer "3V3_L01_P027" (solid, remove dead copper, pour order 27): 1693.75,681.25 1687.5,675 1687.5,650 1693.75,643.75 1831.25,643.75 1837.5,650 1837.5,675 1843.75,681.25 1993.75,681.25 2031.25,718.75 2031.25,887.5 2062.5,918.75 2118.75,918.75 2140.62,940.62 2140.62,984.37 2118.75,1006.25 1943.75,1006.25 1931.25,993.75 1931.25,962.5 1900,931.25 1875,931.25 1793.75,850 1793.75,768.75 1806.25,756.25 1837.5,756.25 1850,768.75 1850,831.25 1868.75,850 1975,850 1993.75,831.25 1993.75,737.5 1975,718.75 1825,718.75 1787.5,681.25
APD- on Top Layer "APD-_L01_P039" (solid, remove dead copper, pour order 39): 1662.5,850 1643.75,850 1612.5,881.25 1612.5,1043.75 1650,1081.25 1687.5,1081.25 1700,1093.75 1700,1231.25 1356.25,1231.25 1343.75,1218.75 1343.75,1162.5 1325,1143.75 1325,1125 1318.75,1118.75 1256.25,1118.75 1243.75,1106.25 1243.75,1068.75 1250,1062.5 1325,1062.5 1337.5,1050 1337.5,1025 1325,1012.5 1262.5,1012.5 1250,1000 1212.5,1000 1200,987.5 1200,893.75 1193.75,887.5 1193.75,825 1200,818.75 1200,681.25 1687.5,681.25 1687.5,825
APD- on Top Layer "APD-_L01_P040" (solid, remove dead copper, pour order 40): 2281.25,1643.75 2281.25,1325 2256.25,1300 2256.25,137.5 2200,81.25 1025,81.25 968.75,137.5 968.75,675 906.25,737.5 1175,737.5 1206.25,768.75 1675,768.75 1712.5,731.25 1768.75,731.25 1784.38,746.88 1840.62,746.88 1856.25,762.5 1856.25,825 1874.76,843.51 1943.75,843.51 1943.75,1012.5 1931.25,1012.5 1918.75,1025 1918.75,1049.76 1906.25,1062.26 1906.25,1200 1887.5,1218.75 1725,1218.75 1699.59,1193.34 1699.59,1162.26 1612.5,1162.26 1612.5,1224.76 1643.75,1256.01 1643.75,1299.76 1656.25,1312.26 1700,1312.26 1725,1337.26 1725,1706.25 1737.5,1718.75 1887.5,1718.75 1906.25,1737.5 1987.5,1737.5 2006.25,1718.75 2206.25,1718.75
APD- on Top Layer "APD-_L01_P029" (solid, remove dead copper, pour order 29): 1687.5,768.75 1687.5,806.25 1612.5,881.25 1612.5,1043.75 1650,1081.25 1687.5,1081.25 1700,1093.75 1700,1181.25 1687.5,1193.75 1612.5,1193.75 1587.5,1168.75 1562.5,1168.75 1550,1156.25 1550,1125 1556.25,1118.75 1587.5,1118.75 1600,1106.25 1600,1068.75 1587.5,1056.25 1562.5,1056.25 1550,1043.75 1550,987.5 1556.25,981.25 1556.25,918.75 1531.25,893.75 1531.25,756.25 1675,756.25
NetC14_2 on Top Layer "3" (solid, remove dead copper, pour order 26): 1637.5,887.5 1650,875 1675,875 1712.5,837.5 1712.5,768.75 1725,756.25 1756.25,756.25 1768.75,768.75 1768.75,975 1762.5,981.25 1712.5,981.25 1706.25,975 1706.25,950 1687.5,931.25 1650,931.25 1637.5,918.75
RETURN on Top Layer "RETURN_L01_P015" (solid, remove dead copper, pour order 15): 2306.25,1662.5 2306.25,1312.5 2281.25,1287.5 2281.25,112.5 2225,56.25 1012.5,56.25 1012.5,31.25 2306.25,31.25 2306.25,1768.75 1700,1768.75 1725,1743.75 1875,1743.75 1893.75,1762.5 2000,1762.5 2018.75,1743.75 2225,1743.75
NetC18_2 on Top Layer "NETC18_2_L01_P013" (solid, remove dead copper, pour order 13): 1581.25,1618.09 1594.47,1618.09 1606.28,1606.28 1606.28,1543.78 1700,1450.06 1700,1362.5 1687.53,1350.03 1643.78,1350.03 1631.28,1362.53 1631.28,1411.81 1506.25,1536.84 1362.5,1536.84 1356.25,1530.59 1362.5,1524.34 1500,1524.34 1618.75,1405.59 1618.75,1268.75 1606.25,1256.25 1450,1256.25 1437.5,1268.75 1437.5,1393.09 1343.75,1486.84 1281.25,1486.84 1250,1518.09 1250,1605.59 1262.5,1618.09
VBUS on Top Layer "VBUS_L01_P028" (solid, remove dead copper, pour order 28): 1868.75,1193.75 1881.25,1181.25 1881.25,1093.75 1868.75,1081.25 1812.5,1081.25 1793.75,1062.5 1793.75,1018.75 1768.75,993.75 1712.5,993.75 1706.25,1000 1706.25,1012.5 1712.5,1018.75 1756.25,1018.75 1768.75,1031.25 1768.75,1062.5 1750,1081.25 1737.5,1081.25 1725,1093.75 1725,1181.25 1737.5,1193.75
APD- on Top Layer "APD-_L01_P031" (solid, remove dead copper, pour order 31): 1981.25,818.75 1968.75,831.25 1875,831.25 1862.5,818.75 1862.5,768.75 1875,756.25 1968.75,756.25 1981.25,768.75
NetC10_2 on Top Layer "NETC10_2_L01_P038" (solid, remove dead copper, pour order 38): 650,1081.25 637.5,1068.75 581.25,1068.75 568.75,1081.25 568.75,1168.75 581.25,1181.25 637.5,1181.25 650,1168.75
NetC11_1 on Top Layer "NETC11_1_L01_P002" (solid, remove dead copper, pour order 2): 431.25,1543.75 418.75,1531.25 418.75,1525 418.75,1406.25 437.5,1387.5 625,1387.5 625,1643.75 643.75,1662.5 681.25,1662.5 687.5,1656.25 681.25,1650 650,1650 637.5,1637.5 637.5,1368.75 675,1331.25 675,1062.5 687.5,1050 743.75,1050 756.25,1062.5 756.25,1212.5 706.25,1262.5 706.25,1368.75 687.5,1368.75 668.75,1387.5 668.75,1587.5 681.25,1600 743.75,1600 756.25,1612.5 756.25,1700 743.75,1712.5 643.75,1712.5 593.75,1662.5 593.75,1562.5 575,1543.75
APD- on Top Layer "APD-_L01_P037" (solid, remove dead copper, pour order 37): 50,1643.75 50,1512.51 81.25,1481.26 81.25,1206.25 93.75,1193.75 118.75,1193.75 131.25,1206.25 131.25,1231.25 156.25,1256.25 306.25,1256.25 318.75,1268.75 318.75,1487.5 306.25,1500 100,1500 75,1525 75,1631.25 100,1656.25 381.25,1656.25 393.75,1668.75 393.75,1706.25 381.25,1718.75 125,1718.75
RETURN on Top Layer "RETURN_L01_P024" (solid, remove dead copper, pour order 24): 56.25,1468.75 31.25,1493.75 31.25,1662.5 112.5,1743.75 425,1743.75 450,1768.75 31.25,1768.75 31.25,31.25 1012.5,31.25 1012.5,56.25 937.5,131.25 743.75,131.25 700,175 650,175 606.25,218.75 506.25,218.75 387.5,337.5 387.5,656.25 262.5,781.25 75,781.25 56.25,800
APD+ on Top Layer "APD+_L01_P023" (solid, remove dead copper, pour order 23): 375,1212.5 356.25,1193.75 262.5,1193.75 250,1206.25 250,1218.75 262.5,1231.25 312.5,1231.25 343.75,1262.5 343.75,1287.5 343.75,1375 343.75,1500 318.75,1525 112.5,1525 93.75,1543.75 93.75,1612.5 112.5,1631.25 381.25,1631.25 393.75,1618.75 393.75,1400 431.25,1362.5 431.25,1312.5 468.75,1275 468.75,1225 456.25,1212.5
NetD3_A on Top Layer "NETD3_A_L01_P022" (solid, remove dead copper, pour order 22): 1175,806.25 1168.75,812.5 1168.75,900 1175,906.25 1175,1212.5 1218.75,1256.25 1400,1256.25 1412.5,1268.75 1412.5,1387.5 1337.5,1462.5 1275,1462.5 1225,1512.5 1225,1537.5 1212.5,1550 1187.5,1550 1112.5,1550 1100,1537.5 1100,1431.25 1112.5,1418.75 1162.5,1418.75 1175,1406.25 1175,1300 1150,1275 900,1275 887.5,1262.5 887.5,775 900,762.5 1162.5,762.5 1175,775
NetC10_2 on Top Layer "NETC10_2_L01_P017" (solid, remove dead copper, pour order 17): 650,875 637.5,862.5 581.25,862.5 568.75,875 568.75,962.5 581.25,975 637.5,975 650,962.5
NetQ1_1 on Top Layer "NETQ1_1_L01_P014" (solid, remove dead copper, pour order 14): 1143.75,1300 1150,1306.25 1150,1387.5 1143.75,1393.75 1062.5,1393.75 1050,1381.25 1050,1312.5 1062.5,1300
VBUS on Top Layer "VBUS_L01_P003" (solid, remove dead copper, pour order 3): 1662.5,1768.75 1700,1731.25 1700,1556.25 1687.5,1543.75 1643.75,1543.75 1631.25,1556.25 1631.25,1618.75 1606.25,1643.75 1581.25,1643.75 1256.25,1643.75 1225,1612.5 1225,1587.5 1212.5,1575 1187.5,1575 1100,1575 1071.88,1603.12 1015.62,1603.12 1000,1618.75 1000,1712.5 975,1737.5 781.25,1737.5 768.75,1725 637.5,1725 581.25,1668.75 581.25,1568.75 568.75,1556.25 431.25,1556.25 418.75,1568.75 418.75,1706.25 481.25,1768.75 1087.5,1768.75 1100,1756.25 1100,1712.5 1106.25,1706.25 1112.5,1712.5 1112.5,1756.25 1125,1768.75
NetQ1_3 on Top Layer "NETQ1_3_L01_P011" (solid, remove dead copper, pour order 11): 1075,1481.25 1075,1431.25 1062.5,1418.75 1037.5,1418.75 1025,1406.25 1025,1312.5 1012.5,1300 925,1300 900,1300 887.5,1312.5 887.5,1481.25 900,1493.75 1062.5,1493.75
APD- on Top Layer "APD-_L01_P010" (solid, remove dead copper, pour order 10): 875,1506.25 862.5,1518.75 831.25,1518.75 831.25,1593.75 825,1600 793.75,1600 781.25,1612.5 781.25,1700 793.75,1712.5 962.5,1712.5 975,1700 975,1606.25 1003.12,1578.12 1065.62,1578.12 1075,1568.75 1075,1518.75 1062.5,1506.25
NetC10_1 on Top Layer "NETC10_1_L01_P004" (solid, remove dead copper, pour order 4): 650,1218.75 637.5,1206.25 568.75,1206.25 543.75,1181.25 543.75,1068.75 568.75,1043.75 643.75,1043.75 650,1037.5 650,1006.25 643.75,1000 568.75,1000 543.75,975 543.75,862.5 568.75,837.5 650,837.5 675,862.5 675,1018.75 687.5,1031.25 743.75,1031.25 756.25,1018.75 756.25,775 743.75,762.5 562.5,762.5 500,825 500,1250 537.5,1287.5 637.5,1287.5 650,1275
NetC10_2 on Top Layer "NETC10_2_L01_P005" (solid, remove dead copper, pour order 5): 850,1031.25 862.5,1018.75 862.5,775 850,762.5 793.75,762.5 781.25,775 781.25,1018.75 793.75,1031.25
NetC11_2 on Top Layer "NETC11_2_L01_P001" (solid, remove dead copper, pour order 1): 700,1500 693.75,1493.75 693.75,1393.75 700,1387.5 806.25,1387.5 831.25,1362.5 831.25,1262.5 781.25,1212.5 781.25,1062.5 793.75,1050 850,1050 862.5,1062.5 862.5,1250 862.5,1487.5 850,1500
APD- on Bottom Layer "APD-_L02_P036" (solid, remove dead copper, pour order 36): 2256.25,1318.75 2168.75,1318.75 2131.25,1356.25 2131.25,1418.75 2162.5,1450 2256.25,1450 2256.25,1518.75 2162.5,1518.75 2131.25,1550 2131.25,1612.5 2162.5,1643.75 2256.25,1643.75 2255.76,1644.24 2255.76,1669.24 2206.25,1718.75 125,1718.75 80.36,1674.11 80.36,1643.75 168.75,1643.75 200,1612.5 200,1550 168.75,1518.75 81.25,1518.75 81.25,1306.25 137.5,1250 206.25,1250 300,1156.25 300,1093.75 312.5,1081.25 368.75,1081.25 450,1000 450,887.5 612.5,725 918.75,725 968.75,675 968.75,287.5 912.5,231.25 912.5,193.75 1025,81.25 2200,81.25 2256.25,137.5
RETURN on Bottom Layer "RETURN_L02_P035" (solid, remove dead copper, pour order 35): 56.25,1687.5 56.25,1468.75 56.25,1293.75 125,1225 200,1225 275,1150 275,768.75 387.5,656.25 387.5,468.75 512.5,343.75 512.5,256.25 550,218.75 606.25,218.75 650,175 693.75,175 893.75,175 1012.5,56.25 1012.5,31.25 968.75,31.25 31.25,31.25 31.25,1768.75 2100,1768.75 2100,1743.75 1925,1743.75 1893.75,1712.5 1881.25,1712.5 1850,1743.75 112.5,1743.75
VBUS on Bottom Layer "VBUS_L02_P009" (solid, remove dead copper, pour order 9): 1400,1287.5 1375,1312.5 1375,1468.75 1162.5,1681.25 1018.75,1681.25 1000,1662.5 1000,1618.75 1006.25,1612.5 1018.75,1612.5 1093.75,1612.5 1275,1431.25 1275,1181.25 1281.25,1175 1293.75,1175 1300,1181.25 1300,1437.5 1106.25,1631.25 1028.12,1631.25 1025,1634.38 1028.12,1637.5 1106.25,1637.5 1306.25,1437.5 1306.25,1281.25 1368.75,1218.75 1743.75,1218.75 1768.75,1193.75 1768.75,1093.75 1781.25,1081.25 1825,1081.25 1837.5,1093.75 1837.5,1225 1775,1287.5
NetC10_2 on Bottom Layer "NETC10_2_L02_P018" (solid, remove dead copper, pour order 18): 812.5,862.5 800,875 687.5,875 650,912.5 650,1168.75 637.5,1181.25 581.25,1181.25 568.75,1168.75 568.75,875 681.25,762.5 800,762.5 812.5,775
RETURN on Bottom Layer "RETURN_L02_P034" (solid, remove dead copper, pour order 34): 2281.25,1687.5 2281.25,1287.5 2281.25,112.5 2225,56.25 1012.5,56.25 1012.5,31.25 2306.25,31.25 2306.25,1768.75 2093.75,1768.75 2093.75,1743.75 2225,1743.75
NetC11_2 on Bottom Layer "NETC11_2_L02_P033" (solid, remove dead copper, pour order 33): 851.79,1387.5 862.5,1402.5 862.5,1487.5 850,1500 687.5,1500 675,1487.5 675,1400 687.5,1387.5
NetD3_A on Bottom Layer "NETD3_A_L02_P025" (solid, remove dead copper, pour order 25): 887.5,918.75 900,906.25 900,806.25 912.5,793.75 962.5,793.75 993.75,762.5 1162.5,762.5 1175,775 1175,1081.25 1125,1131.25 1125,1262.5 1112.5,1275 900,1275 887.5,1262.5

## Other copper
Top Layer:
  pour cut-out: 1368.75,262.5 1325,262.5 1237.5,175 1118.75,175 1081.25,212.5 1081.25,637.5 1118.75,675 1237.5,675 1325,587.5 1368.75,587.5 1387.5,568.75 1387.5,531.25 1400,518.75 1512.5,518.75 1543.75,487.5 1637.5,487.5 1637.5,362.5 1543.75,362.5 1506.25,325 1400,325 1387.5,312.5 1387.5,281.25

## Silkscreen, mask and mechanical layers (free items; w line width, h text height)
Bottom Overlay:
  drawing of 3 lines, arcs and shapes, not listed
  text "+ LED −" at 2318.75,1626.57 h78.74 r90
  text "− AUX +" at 12.5,1339.07 h78.74 r270
  text "PoE LED Driver Rev '.revision'" at 1187.5,609.38 h50 r270
  text "PoE/PoE+" at 12.5,228.12 h78.74 r270
Mechanical 1:
  lines w1.97: 0,0 2331.25,0 2331.25,1793.75 1256.25,1793.75 0,1793.75 0,0

## Text inside footprints (layer, text, board x,y; h text height)
DB1: Top Overlay "-" at 548.85,917.6 h32.06 r180; Top Overlay "+" at 548.82,827.46 h32.04 r180
DB2: Top Overlay "-" at 548.85,1123.85 h32.06 r180; Top Overlay "+" at 548.82,1033.71 h32.04 r180